# EAGLE board BATT_INPUT_TEST_BED_V2 (EAGLE 9.6.2)
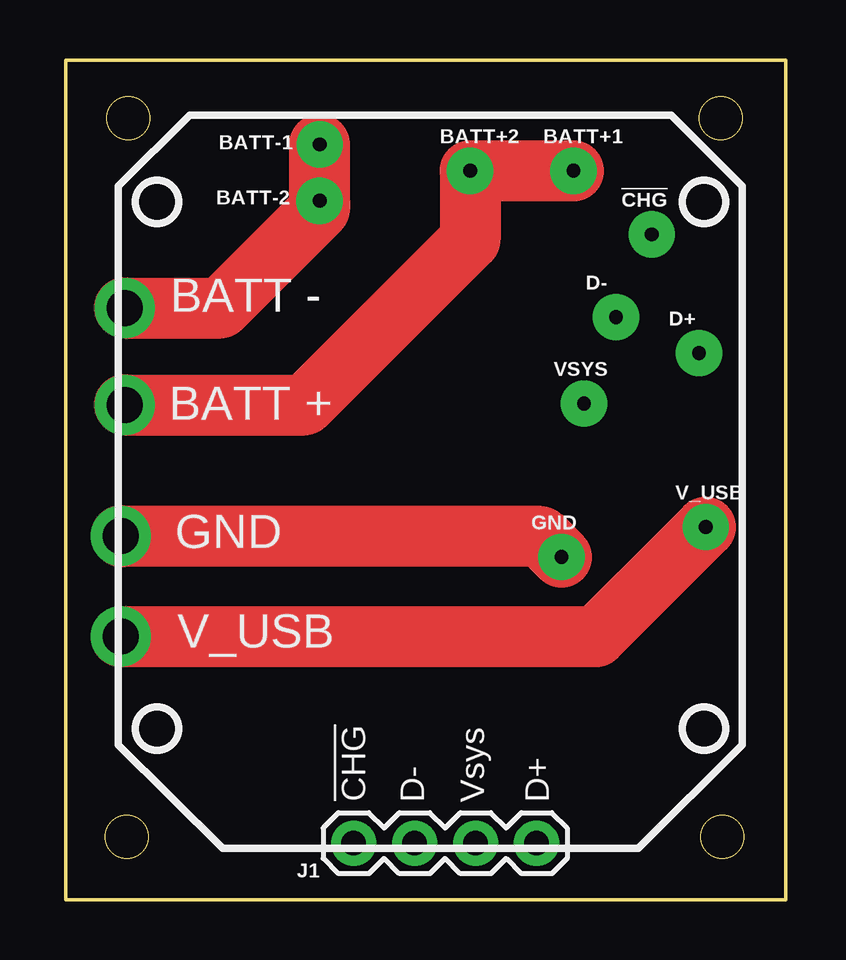
[diagram p0: board, top side]
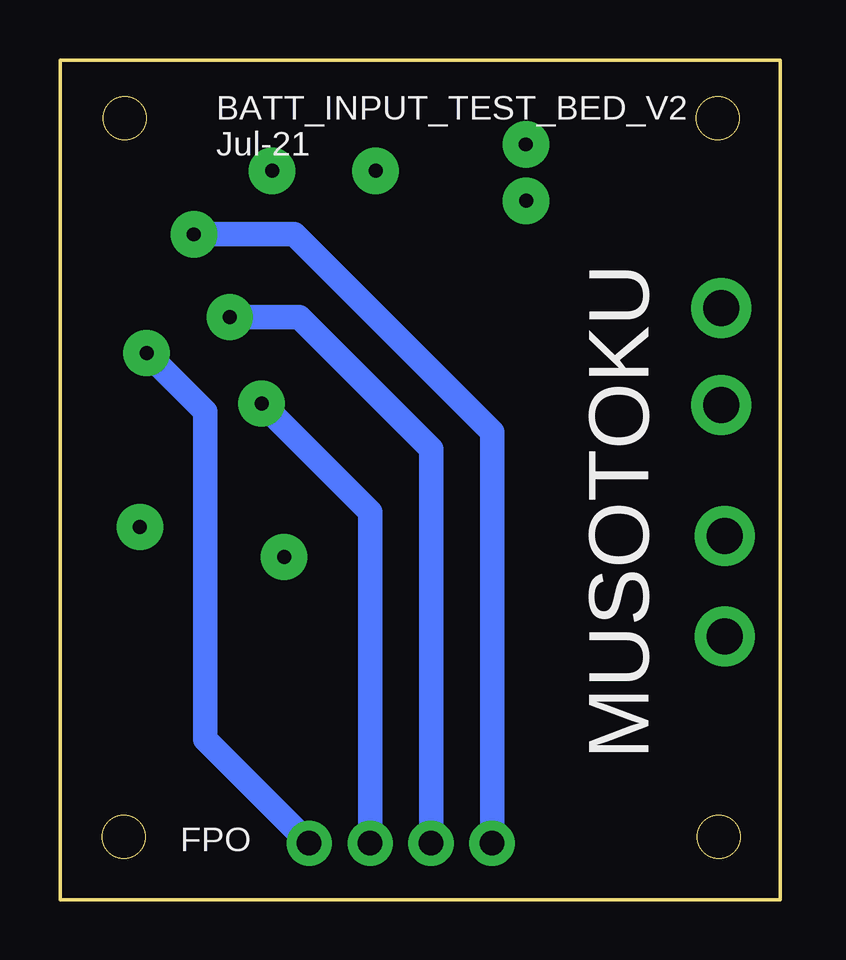
[diagram p1: board, bottom side, seen from below]

Size 30 x 35 mm. Coordinates in mm from the lower left corner, seen from the top.
Outline: 0,35 30,35 30,0 0,0 0,35
Outline: circle at 2.55,2.62 radius 0.9
Outline: circle at 27.35,2.62 radius 0.9
Outline: circle at 2.6,32.58 radius 0.9
Outline: circle at 27.3,32.58 radius 0.9
Copper layers (1*16): Top 0.035mm / dielectric 1.5mm / Bottom 0.035mm
Design rules "default *": minimum track width 6mil, minimum drill 0.3mm, track to track 6mil, track to pad 6mil, pad to pad 6mil, via to via 8mil, smd to smd 6mil, copper to edge 10mil, drill to drill 10mil, minimum pad ring 10mil, minimum via ring 8mil, stop-mask expansion 4mil, vias tented up to drill 50mil, thermal gap 10mil
Net classes: 1 power: width 0.178 mm; 2 gnd: width 0.305 mm, drill 0.483 mm, clearance 0.203 mm

## Footprints (pad centres in the part's own frame; a part is rotated, then mirrored left to right if it is on the bottom)
1X01_POGOPIN_HOLE_0.061_DIA = drill 0.58 pad 1.93: 2 0,0
1X04 = drill 1.016 pad 1.88: 1 0,0; 2 2.54,0; 3 5.08,0; 4 7.62,0

## Placement (x,y rotation side)
!CHG!  [1X01_POGOPIN_HOLE_0.061_DIA]  24.42,27.73 0 top
BATT+1  [1X01_POGOPIN_HOLE_0.061_DIA]  21.16,30.38 0 top
BATT+2  [1X01_POGOPIN_HOLE_0.061_DIA]  16.85,30.38 0 top
BATT-1  [1X01_POGOPIN_HOLE_0.061_DIA]  10.59,31.48 0 top
BATT-2  [1X01_POGOPIN_HOLE_0.061_DIA]  10.58,29.13 0 top
D+  [1X01_POGOPIN_HOLE_0.061_DIA]  26.39,22.78 0 top
D-  [1X01_POGOPIN_HOLE_0.061_DIA]  22.93,24.28 0 top
GND  [1X01_POGOPIN_HOLE_0.061_DIA]  20.66,14.28 0 top
J1  FEMALE 2x3  [1X04]  12,2.35 0 top
V_USB  [1X01_POGOPIN_HOLE_0.061_DIA]  26.67,15.53 0 top
VSYS  [1X01_POGOPIN_HOLE_0.061_DIA]  21.6,20.68 0 top

## Library data of the parts
!CHG! BATT+1 BATT+2 BATT-1 BATT-2 D+ D- GND V_USB VSYS = SparkFun-Connectors
J1 = SparkFun-Connectors; PROD_ID: CONN-09696

## Nets
BATT+: BATT-1.2 BATT-2.2
BATT-: BATT+1.2 BATT+2.2
GND: GND.2
N$1: J1.3 VSYS.2
N$2: D+.2 J1.4
N$3: !CHG!.2 J1.1
N$4: D-.2 J1.2
V_USB: V_USB.2

## Tracks (layer width: path | path; a pad name or v marks a point on that pad's centre or on a via)
BATT+  (via drill 1.5 pad 2.5)
  Top 1.016: BATT-1.2
  Top 2.54: v2.45,24.66 6.45,24.66 10.58,28.79 BATT-2.2 BATT-1.2
BATT-  (via drill 1.5 pad 2.5)
  Top 2.54: v2.45,20.62 9.95,20.62 16.85,27.51 BATT+2.2 BATT+1.2
GND  (via drill 1.5 pad 2.5)
  Top 2.54: GND.2 19.81,15.13 2.34,15.13 v2.3,15.16
N$1
  Bottom 1.016: VSYS.2 17.08,16.16 J1.3
N$2
  Bottom 1.016: J1.4 23.95,6.68 23.95,20.34 D+.2
N$3
  Bottom 1.016: !CHG!.2 20.23,27.73 12,19.5 J1.1
N$4
  Bottom 1.016: J1.2 14.54,18.79 20.03,24.28 D-.2
V_USB  (via drill 1.5 pad 2.5)
  Top 2.54: v2.3,10.97 22.11,10.97 V_USB.2

## Text on the board
tNames: BATT - | BATT + | GND | V_USB | !CHG! | D- | Vsys | D+
bNames: BATT_INPUT_TEST_BED_V2 | Jul-21 | MUSOTOKU | FPO